# Altium PCB PCB_2021-02-27.pcbdoc (part 1 of 2)
Units mil, origin at the board's own origin, x right, y up, seen from the top; angles counter-clockwise.
Board outline 2908.11 x 4260.21 mil, 2 copper layers (Top Layer, Bottom Layer); 56 components, 104 nets, 335 pads, 150 vias.
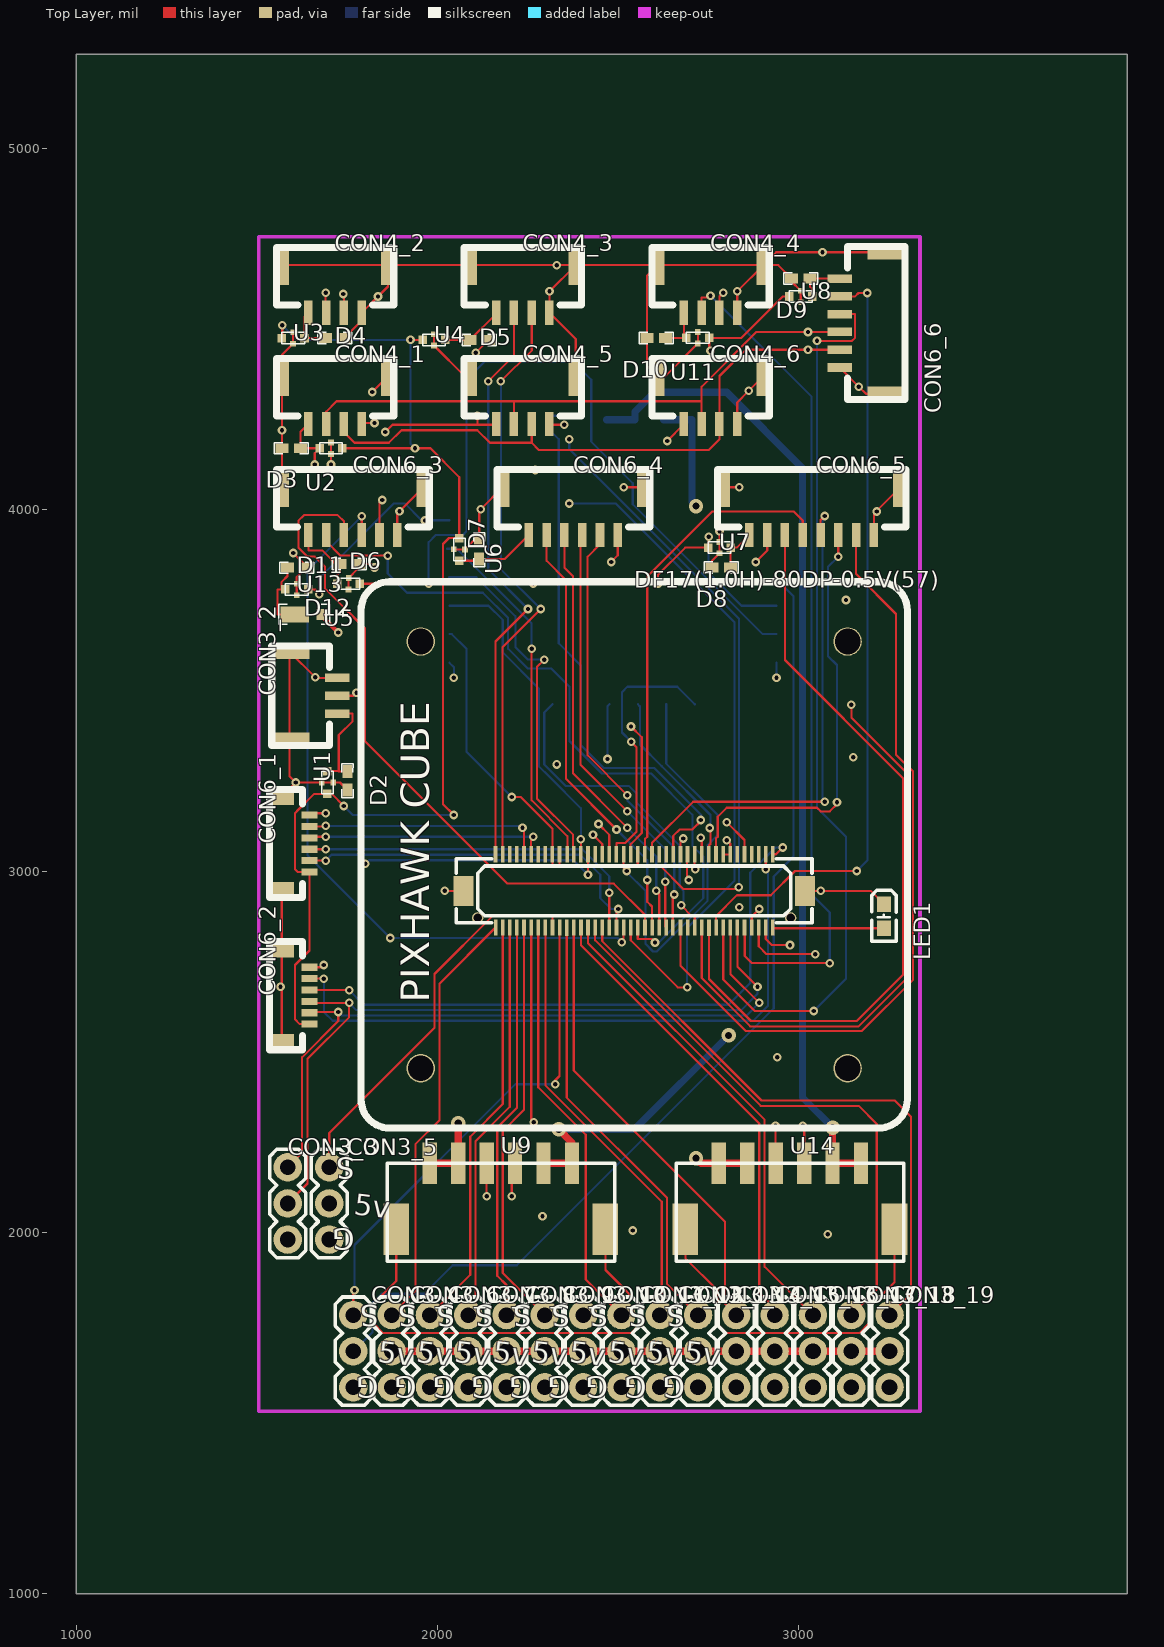
[diagram p0: Top Layer view]
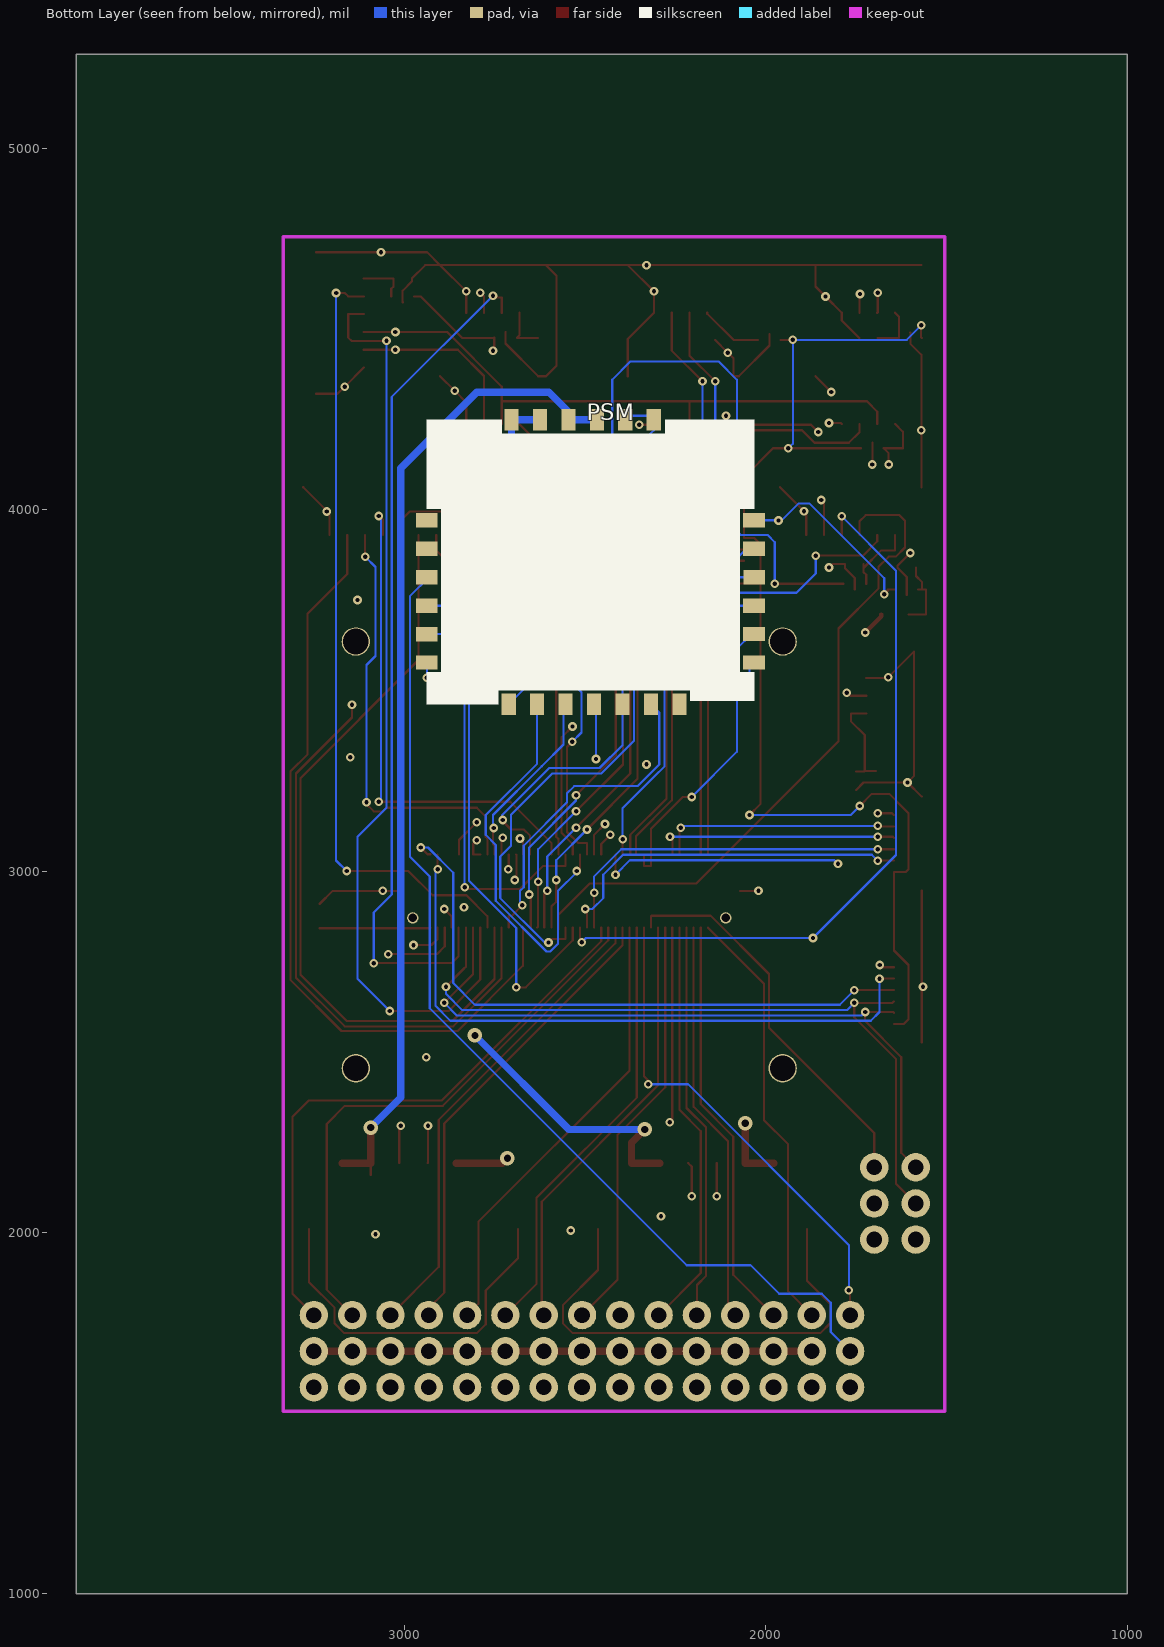
[diagram p1: Bottom Layer view, seen from below]

## Layer stack, top to bottom
Top Layer: signal copper (thickness not stored)
Dielectric: dielectric 12.6, FR-4, Dk 4.8
Bottom Layer: signal copper (thickness not stored)

## Board outline
3908.11,1000 1000,1000 1000,5260.21 3908.11,5260.21

## Components (designator, comment, footprint, x,y, rotation, side; value= is the part's Value field where it differs from the comment)
CON3_2 "ADC" BM03B-GHS-TBT 1722.01,3485 r90 top
CON3_3 "SERIAL 5" "3X1 THROUGH HOLE HEADER" 1585,2180 r0 top
CON3_4 "RC Rx" "3X1 SERVO HEADER" 1766.61,1771.03 r0 top
CON3_5 "SBUS OUT" "3X1 SERVO HEADER" 1700,2180 r0 top
CON3_6 "MOTOR 1" "3X1 SERVO HEADER" 1872.61,1771.03 r0 top
CON3_7 "MOTOR 2" "3X1 SERVO HEADER" 1978.61,1771.03 r0 top
CON3_8 "MOTOR 3" "3X1 SERVO HEADER" 2084.61,1771.03 r0 top
CON3_9 "MOTOR 4" "3X1 SERVO HEADER" 2190.61,1771.03 r0 top
CON3_10 "MOTOR 5" "3X1 SERVO HEADER" 2296.61,1771.03 r0 top
CON3_11 "MOTOR 6" "3X1 SERVO HEADER" 2402.61,1771.03 r0 top
CON3_12 "MOTOR 7" "3X1 SERVO HEADER" 2508.61,1771.03 r0 top
CON3_13 "MOTOR 8" "3X1 SERVO HEADER" 2614.61,1771.03 r0 top
CON3_14 "AUX1" "3X1 THROUGH HOLE HEADER" 2720.61,1771.03 r0 top
CON3_15 "AUX2" "3X1 THROUGH HOLE HEADER" 2826.61,1771.03 r0 top
CON3_16 "AUX3" "3X1 THROUGH HOLE HEADER" 2932.61,1771.03 r0 top
CON3_17 "AUX4" "3X1 THROUGH HOLE HEADER" 3038.61,1771.03 r0 top
CON3_18 "AUX5" "3X1 THROUGH HOLE HEADER" 3144.61,1771.03 r0 top
CON3_19 "AUX6" "3X1 THROUGH HOLE HEADER" 3250.61,1771.03 r0 top
CON4_1 "I2C" BM04B-GHS-TBT 1715.84,4237.5 r0 top
CON4_2 "CAN 1" BM04B-GHS-TBT 1715.84,4545 r0 top
CON4_3 "CAN 2" BM04B-GHS-TBT 2235.42,4545 r0 top
CON4_4 "CAN 3" BM04B-GHS-TBT 2755,4545 r0 top
CON4_5 "I2C" BM04B-GHS-TBT 2235.42,4237.5 r0 top
CON4_6 "I2C" BM04B-GHS-TBT 2755,4237.5 r0 top
CON6_1 "JTAG IO" SM06B-SURS-TF 1645.24,3075.9 r90 top
CON6_2 "JTAG FMU" SM06B-SURS-TF 1645.24,2655 r90 top
CON6_3 "TELEM 1" BM06B-GHS-TBT 1765,3930 r0 top
CON6_4 "TELEM 2" BM06B-GHS-TBT 2375.31,3930 r0 top
CON6_5 "GPS 1" BM08B-GHS-TBT 3034.84,3930 r0 top
CON6_6 "GPS 2" BM06B-GHS-TBT 3112.79,4516.66 r270 top
D2 "DIODE" "0402 DIODE" 1750,3250 r270 top
D3 "DIODE" "0402 DIODE" 1595,4170 r180 top
D4 "DIODE" "0402 DIODE" 1715.59,4475 r0 top
D5 "DIODE" "0402 DIODE" 2115,4470 r0 top
D6 "DIODE" "0402 DIODE" 1755,3850 r0 top
D7 "DIODE" "0402 DIODE" 2115,3889.42 r90 top
D8 "DIODE" "0402 DIODE" 2785,3840 r180 top
D9 "DIODE" "0402 DIODE" 3005,4640 r180 top
D10 "DIODE" "0402 DIODE" 2605,4475 r180 top
D11 "DIODE" "0402 DIODE" 1610,3839.41 r0 top
D12 "DIODE" "MSS1P4-M3/89A DIODE" 1630.51,3710.06 r0 top
DF17(1.0H)-80DP-0.5V(57) "PIXHAWK Cube" CON-DF17-80M 2543.9,2945 r0 top
LED1 "19-213/Y2C-CQ2R2L/3T(CY)" LED0603-R-RD 3235,2875 r270 top
PSM "Power Selection Module" "POWER SELECTION MODULE" 2495,3865 r0 bottom
U1 "FILTER" "0603 LC EMI FILTER" 1695,3245 r90 top
U2 "FILTER" "0603 LC EMI FILTER" 1705,4170 r180 top
U3 "FILTER" "0603 LC EMI FILTER" 1600,4475 r0 top
U4 "FILTER" "0603 LC EMI FILTER" 1990,4470 r0 top
U5 "FILTER" "0603 LC EMI FILTER" 1753.51,3795 r180 top
U6 "FILTER" "0603 LC EMI FILTER" 2060,3890 r270 top
U7 "FILTER" "0603 LC EMI FILTER" 2780,3895 r0 top
U8 "FILTER" "0603 LC EMI FILTER" 3005,4590 r0 top
U9 "Battery1" "MOLEX CLICKMATE 2.0-6P" 2175,2100 r0 top
U11 "FILTER" "0603 LC EMI FILTER" 2720.1,4475.74 r180 top
U13 "FILTER" "0603 LC EMI FILTER" 1610,3779.26 r0 top
U14 "Battery2" "MOLEX CLICKMATE 2.0-6P" 2975,2100 r0 top

## Footprints (in the part's own frame and the unit in brackets; to place one, negate y for a bottom-side part, rotate by r counter-clockwise, add the part's x,y. Pads: shape width x height; smd on the part's side, far side on the other; paste and mask are expansions set on the pad)
"3X1 SERVO HEADER" [mm]
  round 2 hole 1.1: 1(0,0) 2(0,-2.54) 3(0,-5.08)
  silkscreen extent -1.27,-6.35 1.27,1.27
"3X1 THROUGH HOLE HEADER" [mm]
  round 2 hole 1.1: 1(0,0) 2(0,-2.54) 3(0,-5.08)
  silkscreen extent -1.27,-6.35 1.27,1.27
"0402 DIODE" [mm]
  rect 0.9x0.7 smd: 1(-0.65,0) 2(0.65,0)
  silkscreen extent -1.2,-0.4 1.2,0.4
"0603 LC EMI FILTER" [mm]
  rect 0.6x0.6 smd: 1(-0.8,0) 2(0.8,0)
  rect 0.4x0.4 smd: GND(-0.003,-0.4) GND(0,0.4)
  silkscreen extent -0.8,-0.4 0.8,0.4
BM03B-GHS-TBT [mm]
  rect 0.6x1.7 smd: 1(-1.25,0) 2(0,0) 3(1.25,0)
  rect 1x2.8 smd: GND(-3.1,3.35) GND(3.1,3.35)
  silkscreen extent -3.5,0.55 3.5,4.6
BM04B-GHS-TBT [mm]
  rect 0.6x1.7 smd: 1(-1.87,0) 2(-0.62,0) 3(0.63,0) 4(1.88,0)
  rect 1x2.8 smd: GND(-3.721,3.35) GND(3.729,3.35)
  silkscreen extent -4.12,0.55 4.13,4.6
BM06B-GHS-TBT [mm]
  rect 0.6x1.7 smd: 1(-3.12,0) 2(-1.87,0) 3(-0.62,0) 4(0.63,0) 5(1.88,0) 6(3.13,0)
  rect 1x2.8 smd: GND(-4.97,3.35) GND(4.97,3.35)
  silkscreen extent -5.37,0.55 5.38,4.6
BM08B-GHS-TBT [mm]
  rect 0.6x1.7 smd: 1(-4.37,0) 2(-3.12,0) 3(-1.87,0) 4(-0.62,0) 5(0.63,0) 6(1.88,0) 7(3.13,0) 8(4.38,0)
  rect 1x2.8 smd: GND(-6.22,3.35) GND(6.23,3.35)
  silkscreen extent -6.62,0.55 6.63,4.6
CON-DF17-80M [mm]
  rect 0.254x1.15 smd: 1(9.75,2.57) 2(9.75,-2.57) 3(9.252,2.565) 4(9.251,-2.575) 5(8.754,2.567) 6(8.755,-2.578) 7(8.254,2.567) 8(8.259,-2.577) 9(7.752,2.566) 10(7.757,-2.578) 11(7.252,2.566) 12(7.257,-2.578) 13(6.751,2.566) 14(6.755,-2.578) 15(6.251,2.566) 16(6.256,-2.578) 17(5.751,2.566) 18(5.755,-2.578) 19(5.251,2.565) 20(5.256,-2.579) 21(4.751,2.566) 22(4.755,-2.578) 23(4.25,2.566) 24(4.254,-2.578) 25(3.751,2.566) 26(3.755,-2.578) 27(3.252,2.567) 28(3.258,-2.575) 29(2.751,2.566) 30(2.707,-2.577) 31(2.257,2.567) 32(2.256,-2.578) 33(1.752,2.566) 34(1.761,-2.577) 35(1.253,2.567) 36(1.257,-2.578) 37(0.752,2.566) 38(0.758,-2.577) 39(0.253,2.566) 40(0.257,-2.578) 41(-0.249,2.566) 42(-0.242,-2.578) 43(-0.747,2.566) 44(-0.744,-2.578) 45(-1.248,2.566) 46(-1.242,-2.578) 47(-1.749,2.566) 48(-1.743,-2.578) 49(-2.248,2.566) 50(-2.245,-2.578) 51(-2.748,2.566) 52(-2.743,-2.578) 53(-3.246,2.566) 54(-3.244,-2.578) 55(-3.749,2.566) 56(-3.742,-2.578) 57(-4.245,2.565) 58(-4.245,-2.578) 59(-4.697,2.566) 60(-4.741,-2.579) 61(-5.248,2.566) 62(-5.244,-2.578) 63(-5.748,2.566) 64(-5.743,-2.578) 65(-6.247,2.567) 66(-6.244,-2.578) 67(-6.746,2.568) 68(-6.742,-2.577) 69(-7.248,2.566) 70(-7.242,-2.576) 71(-7.749,2.566) 72(-7.743,-2.578) 73(-8.245,2.566) 74(-8.245,-2.578) 75(-8.748,2.566) 76(-8.741,-2.578) 77(-9.246,2.566) 78(-9.244,-2.578) 79(-9.748,2.566) 80(-9.742,-2.578)
  round 2 hole 1.8: 81(-15,-12.47) 82(15,17.53) 83(-15,17.53) xx(15,-12.47)
  round 0.8 hole 0.6: HOLE1(11.001,-1.9) HOLE2(-11.001,-1.9)
  rect 1.4x2.101 smd: SIT1(12.011,0) SIT2(-12,0)
  silkscreen extent -19.2,-16.67 19.2,21.73
LED0603-R-RD [mil]
  rect 43x39 smd: 1(33.5,0) 2(-33.5,0)
  silkscreen extent -72,-34 70,34
"MOLEX CLICKMATE 2.0-6P" [mm]
  rect 1x2.9 smd: 1(5,2.325) 2(3,2.325) 3(1,2.325) 4(-1,2.325) 5(-3,2.325) 6(-5,2.325)
  rect 1.8x3.6 smd: 7(-7.35,-2.325) 7(7.35,-2.325)
  silkscreen extent -8,-4.57 8,2.32
"MSS1P4-M3/89A DIODE" [mm]
  rect 2x1.1 smd: 1(-0.648,-0.002)
  rect 0.8x0.8 smd: 2(1.252,-0.002)
  silkscreen extent -1.8,-0.7 1.8,0.7
"POWER SELECTION MODULE" [mil]
  rect 60x39.37 smd: 1(442.91,-105.91) 2(442.91,-27.17) 3(443.11,51.97) 4(442.92,130.71) 5(442.91,209.45) 6(442.91,288.19) 14(-462.6,288.2) 15(-462.6,209.44) 16(-462.6,130.7) 17(-462.7,51.96) 18(-462.5,-26.77) 19(-462.6,-105.51)
  rect 39.37x60 smd: 7(216.52,403.54) 8(137.8,403.54) 9(59.06,403.54) 10(-19.67,403.44) 11(-98.42,403.54) 12(-177.16,403.64) 13(-255.9,403.44) 20(-185.05,-383.86) 21(-106.3,-383.86) 22(-27.56,-383.76) 23(51.18,-383.86) 24(129.92,-383.86) 25(208.66,-383.76)
  silkscreen extent -463,-384 443,404
SM06B-SURS-TF [mm]
  rect 0.5x1.1 smd: 1(-2,0) 2(-1.2,0) 3(-0.4,0) 4(0.4,0) 5(1.2,0) 6(2,0)
  rect 1.2x1.7 smd: GND(-3.3,1.95) GND(3.3,1.95)
  silkscreen extent -3.8,0.5 3.8,2.8

## Via types
v1: diameter 24, hole 12, Top Layer to Bottom Layer, 144 vias
v2: diameter 40, hole 20, Top Layer to Bottom Layer, 6 vias

## Nets (pads, with @x,y where several pads share a name; then routed paths per layer and width w, separated by ;. In a path a pad name is that pad's centre, name@x,y a point inside that pad or via, vN(x,y) a via of type N, cw(c..) or ccw(c..) an arc to the next point about the centre after c; other vN are vias at no path point)
ALARM: DF17(1.0H)-80DP-0.5V(57).24 PSM.12 | length 911.8
  Top Layer w6: v1(2674.1,2904.8) 2703.6,2875.2 2711.4,2875.2 2711.4,2843.5
  Bottom Layer w6: PSM.12@2317.9,3461.4 2295,3438.5 2295,3295 2355,3235 2530,3235 2550,3215 2550,3190 2670,3070 2670,2955 2680,2945 2680,2910.7 v1(2674.1,2904.8)
AUX_BATT_CURRENT_SENS: DF17(1.0H)-80DP-0.5V(57).25 U14.3 | length 989.5
  Top Layer w6: 2691.6,3046 2690,3044.4 2690,2980 v1(2695,2975) ; v1(3010,2295) 3014.37,2290.63 U14.3@3014.37,2191.53
  Mid-Layer 2 w6: v1(2695,2975) 2770,2900 2770,2535 v1(3010,2295)
AUX_BATT_VOLTAGE_SENS: DF17(1.0H)-80DP-0.5V(57).23 U14.4 | length 994.4
  Top Layer w6: 2711.23,3046.03 2711.23,3008.77 v1@2715,3005 ; v1(2935,2295) 2935,2192.17 U14.4@2935.63,2191.53
  Mid-Layer 2 w6: v1@2715,3005 2690,3005 2670,2985 2670,2965 2755,2880 2755,2530 2935,2350 v1@2935,2300
  other v1: 2713,3005
BATT_CURRENT_SENS_PROT: DF17(1.0H)-80DP-0.5V(57).49 U9.3 | length 1324.1
  Top Layer w6: v1(2205,2100) 2205,2182.17 U9.3@2214.37,2191.53 ; v1(2430,3100) 2455.41,3074.59 2455.41,3046.03
  Mid-Layer 2 w6: v1(2205,2100) 2205,2975 2345,3115 2415,3115 v1(2430,3100)
BATT_VOLTAGE_SENS_PROT: DF17(1.0H)-80DP-0.5V(57).47 U9.4 | length 1407.6
  Top Layer w6: v1(2135.63,2100) U9.4@2135.63,2191.53 ; v1(2445,3130) 2475.06,3099.94 2475.06,3046.03
  Mid-Layer 2 w6: v1(2135.63,2100) 2170,2134.37 2170,2890 2170,2960 2315,3105 2340,3130 v1(2445,3130)
BUZZER_OUT: PSM.13
CAN_H_1: CON4_3.2 DF17(1.0H)-80DP-0.5V(57).79 | length 1611.2
  Top Layer w6: v1(2140,4355) 2211.01,4426.01 CON4_3.2@2211.01,4545 ; 2160.14,3046.03 2160.14,3635.14 v1(2250,3725)
  Bottom Layer w6: v1(2140,4355) 2140,3835 v1(2250,3725)
CAN_H_2: CON4_2.2 DF17(1.0H)-80DP-0.5V(57).41 | length 2295.8
  Top Layer w6: v1(1690,4600) 1690,4546.43 CON4_2.2@1691.43,4545 ; 2534.1,3046 2534.1,3074.1 2565,3105 2565,3370 v1(2535,3400)
  Mid-Layer 2 w6: v1(1690,4600) 1695,4600 2125,4170 2460,4170 2560,4070 2560,3970 2670,3860 2670,3535 v1(2535,3400)
CAN_H_3: CON4_4.2 DF17(1.0H)-80DP-0.5V(57).10 | length 2374.4
  Top Layer w6: CON4_4.2@2730.59,4545 2730.6,4587.6 2750.7,4587.6 v1(2755.1,4592) ; 2850,2843.5 2850,2765 2870,2745 v1(3085,2745)
  Bottom Layer w6: v1(2755.1,4592) 3035,4312.1 3035,2935 3085,2885 v1(3085,2745)
CAN_L_1: CON4_3.3 DF17(1.0H)-80DP-0.5V(57).77 | length 1623.4
  Top Layer w6: v1(2175,4355) 2260.23,4440.23 CON4_3.3@2260.23,4545 ; 2179.87,3046.03 2179.87,3619.87 v1(2285,3725)
  Bottom Layer w6: v1(2175,4355) 2175,3835 v1(2285,3725)
CAN_L_2: CON4_2.3 DF17(1.0H)-80DP-0.5V(57).39 | length 2625.4
  Top Layer w6: v1(1739.1,4597.1) 1739.1,4589.2 1740.7,4587.6 CON4_2.3@1740.7,4545 ; 2553.9,3046 2553.9,3014.3 2615.7,3014.3 2680,2950 2828,2950 v1(2833.3,2955.3)
  Mid-Layer 2 w6: v1(1739.1,4597.1) 1739.1,4585.9 2129.7,4195.3 v1(2364.3,4195.3)
  Bottom Layer w6: v1(2364.3,4195.3) 2364.3,4168 2833.6,3698.7 2833.6,2955.5 v1(2833.3,2955.3)
CAN_L_3: CON4_4.3 DF17(1.0H)-80DP-0.5V(57).8 | length 1865.8
  Top Layer w6: CON4_4.3@2779.81,4545 2779.81,4589.81 v1(2790,4600) ; 2869.04,2843.56 2869.04,2874.04 v1(2890,2895)
  Mid-Layer 2 w6: v1(2790,4600) 2805,4585 2805,3320 2880,3245 2880,3240 2880,2905 v1(2890,2895)
CON3_2_1: CON3_2.1 D2.1 U1.2 | length 273.2
  Top Layer w6: U1.2@1695,3276.5 1726.2,3276.5 ; CON3_2.1@1722.02,3435.79 1764.6,3435.8 1764.6,3414.9 1726.2,3376.5 1726.2,3276.5 ; D2.1@1750,3275.59 1727.1,3275.6 1726.2,3276.5
D4_1: CON4_2.1 D4.1 U3.2 | length 132.9
  Top Layer w6: CON4_2.1@1642.22,4544.99 1631.5,4534.27 U3.2@1631.5,4475 D4.1@1690,4475
D5_1: CON4_3.1 D5.1 U4.2 | length 172.9
  Top Layer w6: U4.2@2021.5,4470 D5.1@2089.41,4470 2161.8,4542.39 CON4_3.1@2161.8,4544.99
D6_1: CON6_3.1 D6.1 U5.2 | length 208
  Top Layer w6: CON6_3.1@1642.17,3930 1642.2,3887.4 1680.5,3887.4 D6.1@1729.4,3838.6 ; U5.2@1722.01,3795 1722,3819.7 1729.4,3827.1 D6.1@1729.4,3838.6 ; D6.1@1729.41,3850 D6.1@1729.4,3838.6
D7_1: CON6_4.1 D7.1 U6.2 | length 222.1
  Top Layer w6: U6.2@2060,3858.5 2109.67,3858.5 D7.1@2115,3863.83 2186.31,3863.83 CON6_4.1@2252.48,3930
D8_1: CON6_5.1 D8.1 U7.2 | length 121.2
  Top Layer w6: D8.1@2810.59,3840 2810.59,3894.09 U7.2@2811.5,3895 2827.79,3895 CON6_5.1@2862.79,3930
D9_1: CON6_6.1 D9.1 U8.2 | length 134.9
  Top Layer w6: U8.2@3036.5,4590 3036.5,4611.2 3030.6,4617.1 D9.1@3030.59,4640 3069.7,4640 3070.2,4639.5 CON6_6.1@3112.79,4639.49
D10_1: CON4_4.1 D10.1 U11.2 | length 130.6
  Top Layer w6: D10.1@2630.59,4475 2687.86,4475 U11.2@2688.6,4475.74 2681.38,4482.96 CON4_4.1@2681.38,4544.99
D11_1: D11.1 D12.1 U13.1 | length 216.4
  Top Layer w6: D11.1@1584.41,3839.41 1584.4,3816.5 1568.1,3800.2 1568.1,3779.3 U13.1@1578.51,3779.26 1557.6,3779.3 1556.5,3778.2 1556.5,3710 D12.1@1605,3710
DF17(1.0H)-80DP-0.5V(57)_26: DF17(1.0H)-80DP-0.5V(57).26
DF17(1.0H)-80DP-0.5V(57)_65: DF17(1.0H)-80DP-0.5V(57).65
EXTERN_CS: DF17(1.0H)-80DP-0.5V(57).5
EXTERN_DRDY: DF17(1.0H)-80DP-0.5V(57).11
FMU-!RESET: DF17(1.0H)-80DP-0.5V(57).7
FMU-CH1-PROT: CON3_19.1 DF17(1.0H)-80DP-0.5V(57).50 | length 1667
  Top Layer w6: 2455.5,2843.5 2455.5,2805.9 2896.4,2365 3265,2365 3310,2320 3310,1830.4 CON3_19.1@3250.61,1771.03
FMU-CH2-PROT: CON3_18.1 DF17(1.0H)-80DP-0.5V(57).52 | length 1583
  Top Layer w6: 2435.9,2843.5 2435.9,2808.3 2894.2,2350 3165,2350 3215,2300 3215,1841.4 CON3_18.1@3144.61,1771.03
FMU-CH3-PROT: CON3_17.1 DF17(1.0H)-80DP-0.5V(57).54 | length 1330.3
  Top Layer w6: 2416.2,2843.5 2416.2,2800.1 2905,2311.3 2905,1904.6 CON3_17.1@3038.61,1771.03
FMU-CH4-PROT: CON3_16.1 DF17(1.0H)-80DP-0.5V(57).56 | length 1294.5
  Top Layer w6: 2396.6,2843.5 2396.6,2794.4 2890,2301 2890,1833.2 2932.6,1790.6 CON3_16.1@2932.61,1771.03
FMU-CH5-PROT: CON3_15.1 DF17(1.0H)-80DP-0.5V(57).58 | length 1258.8
  Top Layer w6: 2376.79,2843.51 2376.79,2448.09 2795.46,2029.41 2795.46,1802.18 CON3_15.1@2826.61,1771.03
FMU-CH6-PROT: CON3_14.1 DF17(1.0H)-80DP-0.5V(57).60 | length 1223
  Top Layer w6: 2357.2,2843.5 2357.2,2372.8 2635,2095 2635,1856.6 CON3_14.1@2720.61,1771.03
FMU-LED_AMBER: DF17(1.0H)-80DP-0.5V(57).2 LED1.1 | length 308.2
  Top Layer w6: 2927.76,2843.82 2930.08,2841.5 LED1.1@3235,2841.5
FMU-SWCLK: CON6_2.5 DF17(1.0H)-80DP-0.5V(57).3 | length 1809.8
  Top Layer w6: CON6_2.5@1645.24,2702.25 1676,2702.2 v1(1685.2,2702.2) ; v1(2908.2,3005) 2908.2,3046
  Bottom Layer w6: v1(1685.2,2702.2) 1685.2,2609.8 1709.4,2585.6 2873,2585.6 2913.8,2626.4 2913.8,2999.4 v1(2908.2,3005)
FMU-SWDIO: CON6_2.4 DF17(1.0H)-80DP-0.5V(57).1 | length 1720.5
  Top Layer w6: CON6_2.4@1645.24,2670.75 1754.25,2670.75 v1(1755,2670) ; 2927.76,3046.18 2936.18,3046.18 v1(2955,3065)
  Bottom Layer w6: v1(1755,2670) 1795,2630 2805,2630 2865,2690 2865,2995 2935,3065 v1(2955,3065)
GND: CON3_2.3 CON3_2.GND CON3_3.3 CON3_4.3 CON3_5.3 CON3_6.3 CON3_7.3 CON3_8.3 CON3_9.3 CON3_10.3 CON3_11.3 CON3_12.3 CON3_13.3 CON3_14.3 CON3_15.3 CON3_16.3 CON3_17.3 CON3_18.3 CON3_19.3 CON4_1.4 CON4_1.GND CON4_2.4 CON4_2.GND CON4_3.4 CON4_3.GND CON4_4.4 CON4_4.GND CON4_5.4 CON4_5.GND CON4_6.4 CON4_6.GND CON6_1.6 CON6_1.GND CON6_2.6 CON6_2.GND CON6_3.6 CON6_3.GND CON6_4.6 CON6_4.GND CON6_5.8 CON6_5.GND CON6_6.6 CON6_6.GND D2.2 D3.2 D4.2 D5.2 D6.2 D7.2 D8.2 D9.2 D10.2 D11.2 DF17(1.0H)-80DP-0.5V(57).13 DF17(1.0H)-80DP-0.5V(57).15 DF17(1.0H)-80DP-0.5V(57).HOLE1 DF17(1.0H)-80DP-0.5V(57).HOLE2 DF17(1.0H)-80DP-0.5V(57).SIT1 DF17(1.0H)-80DP-0.5V(57).SIT2 LED1.2 PSM.6 PSM.14 U1.GND U2.GND U3.GND U4.GND U5.GND U6.GND U7.GND U8.GND U9.5 U9.6 U11.GND U13.GND U14.5 U14.6 | length 7578.9
  Top Layer w6: CON6_2.GND@1568.47,2525.08 1568.46,2676.54 v1(1565,2680) 1568.5,2683.5 CON6_2.GND@1568.48,2784.92 CON6_1.GND@1568.47,2945.98 ; CON6_1.GND@1568.48,3205.82 v1(1607.66,3245) ; CON6_3.GND@1569.34,4061.89 v1(1569.34,4220) CON4_1.GND@1569.34,4369.39 1569.33,4428.68 1599.9,4459.25 1599.9,4490.65 U3.GND@1600,4490.75 ; CON4_2.GND@1569.34,4676.89 CON4_2.GND@1862.64,4676.89 ; v1(1600,3880) 1635.59,3844.41 D11.2@1635.59,3839.41 1610,3813.82 U13.GND@1610,3795 1609.9,3794.9 U13.GND@1609.9,3763.52 ; CON6_2.6@1645.24,2733.74 1678.74,2733.74 v1(1685,2740) ; CON6_1.6@1645.24,3154.64 1650.6,3160 v1(1690,3160) ; v1(1705,4125) U2.GND@1705,4154.26 1705,4185.64 U2.GND@1705.1,4185.74 ; CON3_2.3@1722.01,3534.21 1662.95,3534.21 v1(1661.08,3536.08) CON3_2.GND@1590.12,3607.05 CON3_2.GND@1590.12,3362.96 1590.12,3262.54 v1(1607.66,3245) ; D4.2@1741.18,4475 1789.86,4523.68 CON4_2.4@1789.86,4545 v1(1834.93,4590.07) 1862.64,4617.78 CON4_2.GND@1862.64,4676.89 ; D2.2@1750,3224.41 1729.51,3244.9 1710.75,3244.9 1710.65,3245 1679.25,3245 v1(1607.66,3245) ; U5.GND@1753.51,3779.26 1753.61,3779.36 U5.GND@1753.61,3810.74 1780.59,3837.72 D6.2@1780.59,3850 1815,3850 v1(1825,3840) ; CON4_1.4@1789.86,4237.5 1792.36,4240 v1(1825,4240) ; v1(1819.13,4325.88) CON4_1.GND@1862.64,4369.39 ; CON6_3.6@1888.23,3930 1888.23,3989.45 v1(1894.39,3995.61) CON6_3.GND@1960.67,4061.89 ; U4.GND@1990,4485.74 1989.9,4485.64 U4.GND@1989.9,4454.26 2074.77,4369.39 CON4_5.GND@2088.92,4369.39 2088.92,4418.33 v1(2105.3,4434.7) D5.2@2140.59,4470 ; v1(2020,2945) 2071.46,2945 ; U6.GND@2044.25,3890.1 2044.35,3890 2075.75,3890 2100.75,3915 D7.2@2115,3915.01 2115,3997.24 v1(2118.88,4001.12) CON6_4.GND@2179.65,4061.89 ; CON4_5.4@2309.44,4237.5 2311.94,4235 v1(2350,4235) ; CON4_5.GND@2382.22,4369.39 2382.22,4472.22 CON4_3.4@2309.44,4545 v1(2309.44,4604.11) CON4_3.GND@2382.22,4676.89 ; v1(2480,3855) 2498.54,3873.54 CON6_4.6@2498.54,3930 ; v1(2515,4061.89) CON6_4.GND@2570.98,4061.89 ; U11.GND@2720.2,4491.48 2720.1,4491.39 U11.GND@2720.1,4460 2629.5,4369.39 CON4_6.GND@2608.5,4369.39 2579.42,4398.47 D10.2@2579.41,4475 2579.42,4647.81 CON4_4.GND@2608.5,4676.89 ; D8.2@2759.41,3840 2759.42,3858.78 U7.GND@2779.9,3879.26 2779.9,3910.64 U7.GND@2780,3910.74 v1(2780,3940) ; CON6_5.GND@2789.96,4061.89 v1@2840,4061.89 ; 2790.02,3046.03 2809.7,3046.03 2809.7,3075.3 v1(2800,3085) ; CON4_6.4@2829.02,4237.5 2829.02,4296.61 v1(2861.21,4328.79) CON4_6.GND@2901.8,4369.39 ; CON4_4.4@2829.02,4545 v1(2829.02,4604.11) CON4_4.GND@2901.8,4676.89 ; U8.GND@3004.9,4574.26 3005,4574.36 U8.GND@3005,4605.74 2979.42,4631.32 D9.2@2979.41,4640 2942.53,4676.89 CON4_4.GND@2901.8,4676.89 ; 3016.78,2945.01 v1(3060,2945.01) 3198.49,2945.01 LED1.2@3235,2908.5 ; CON6_6.6@3112.79,4393.43 v1(3165.61,4340.61) 3185.24,4320.99 CON6_6.GND@3244.68,4320.99 ; CON6_5.8@3207.28,3930 3207.28,3987.28 v1(3215,3995) 3215,3996.78 CON6_5.GND@3280.12,4061.89 ; CON6_6.GND@3244.68,4712.32 v1(3065,4712.32) 2937.23,4712.32 CON4_4.GND@2901.8,4676.89 ; CON4_2.GND@1862.64,4676.89 CON4_3.GND@2088.92,4676.89 v1(2330,4676.89) CON4_3.GND@2382.22,4676.89 ; CON4_3.GND@2382.22,4676.89 CON4_4.GND@2608.5,4676.89 ; CON4_4.GND@2608.5,4676.89 CON4_4.GND@2901.8,4676.89
  Top Layer w20: U9.6@1978.15,2191.53 U9.5@2056.89,2191.53 v2(2056.89,2301.89) ; v2(2715,2205) 2728.46,2191.54 U14.6@2778.15,2191.53 U14.5@2856.89,2191.53
  Bottom Layer w6: PSM.14@2032.4,3576.8 2045,3564.2 v1(2045,3535) ; v1(2937.91,3535) PSM.6@2937.91,3576.81
  other v1: 3080,1995 2540,2005 2290,2045 2940,2485 2835,2900 2330,3295 3150,3315 3130,3750 2835,4061.89 2270,4110
I2C_1_SCL: CON6_5.4 DF17(1.0H)-80DP-0.5V(57).37 | length 1327
  Top Layer w6: 2573.52,3046.03 2573.52,3088.52 2580,3095 2580,3815 2715,3950 2760,3995 2985.4,3995 3010.4,3970 CON6_5.4@3010.43,3930
I2C_1_SDA: CON6_5.5 DF17(1.0H)-80DP-0.5V(57).35 | length 1406.1
  Top Layer w6: 2593.3,3046.1 2593.3,3077.8 2707.4,3191.9 v1(3071.3,3191.9) ; CON6_5.5@3059.64,3930 3059.6,3972.6 3061.3,3972.6 v1(3071.3,3982.6)
  Bottom Layer w6: v1@3065,3190 v1@3065,3980.7
I2C_2_SCL: CON4_1.2 CON4_5.2 CON4_6.2 CON6_6.4 DF17(1.0H)-80DP-0.5V(57).6 | length 3936.2
  Top Layer w6: CON4_1.2@1691.43,4237.5 1691.4,4271.4 1720,4300 2211,4300 CON4_5.2@2211.01,4237.5 ; 2210.4,4300 2730,4300 ; CON4_6.2@2730.59,4237.5 2730.59,4340.59 2881.86,4491.86 v1(3025,4491.86) CON6_6.4@3112.79,4491.86 ; 2888.6,2843.5 2888.6,2791.4 2910,2770 v1(3045,2770)
  Mid-Layer 2 w6: v1(3025,4491.86) 3213.14,4491.86 3260,4445 3260,2980 v1@3045,2765
I2C_2_SDA: CON4_1.3 CON4_5.3 CON4_6.3 CON6_6.5 DF17(1.0H)-80DP-0.5V(57).4 | length 3833.6
  Top Layer w6: CON4_1.3@1740.65,4237.5 1740.6,4214.4 1770,4185 1865,4185 1900,4220 2110,4220 2145,4185 2260.2,4185 ; CON4_5.3@2260.23,4237.5 2260.2,4184.8 2280,4165 2750,4165 2779.8,4194.8 CON4_6.3@2779.81,4237.5 2779.81,4369.81 2852.64,4442.64 v1(3025,4442.64) CON6_6.5@3112.79,4442.64 ; 2908.11,2843.64 2908.11,2811.89 2925,2795 v1(2975,2795)
  Mid-Layer 2 w6: v1(2975,2795) 3055,2795 3245,2985 3245,4420 3222.4,4442.6 v1(3025,4442.64)
I2C_5V_BUS: CON4_1.1 CON4_5.1 CON4_6.1 D3.1 U2.2 | length 1388.5
  Top Layer w6: CON4_1.1@1642.22,4237.49 1620.59,4215.86 D3.1@1620.59,4170 U2.2@1673.5,4170 1660,4156.5 v1(1660,4125) ; v1(1855,4215) 1875,4235 2110,4235 ; v1(2110,4260) 2110,4235 ; CON4_5.1@2161.8,4237.49 2159.31,4235 2110,4235 ; v1(2635,4190) 2681.38,4236.38 CON4_6.1@2681.38,4237.49
  Mid-Layer 2 w6: v1(1660,4125) 1750,4215 v1(1855,4215) ; v1@2110,4265 2125,4280 2545,4280 v1(2635,4190)
IO-!RESET: DF17(1.0H)-80DP-0.5V(57).75
IO-CH1-PROT: CON3_6.1 DF17(1.0H)-80DP-0.5V(57).80 | length 1191.7
  Top Layer w6: CON3_6.1@1872.61,1771.03 1938.26,1836.67 1938.26,2243.89 2004.88,2310.52 2004.88,2688.05 2160.34,2843.51
IO-CH2-PROT: CON3_7.1 DF17(1.0H)-80DP-0.5V(57).78 | length 1155.9
  Top Layer w6: CON3_7.1@1978.61,1771.03 2090,1882.4 2090,2265 2180,2355 2180,2843.5
IO-CH3-PROT: CON3_8.1 DF17(1.0H)-80DP-0.5V(57).76 | length 1120.2
  Top Layer w6: CON3_8.1@2084.61,1771.03 2105,1791.4 2105,2252.6 2199.7,2347.3 2199.7,2843.5
IO-CH4-PROT: CON3_9.1 DF17(1.0H)-80DP-0.5V(57).74 | length 1105.6
  Top Layer w6: CON3_9.1@2190.61,1771.03 2190.6,1854.4 2165,1880 2165,2290 2219.3,2344.3 2219.3,2843.5
IO-CH5-PROT: CON3_10.1 DF17(1.0H)-80DP-0.5V(57).72 | length 1145.2
  Top Layer w6: 2239,2843.5 2239,2339 2180,2280 2180,1887.6 CON3_10.1@2296.61,1771.03
IO-CH6-PROT: CON3_11.1 DF17(1.0H)-80DP-0.5V(57).70 | length 1132.1
  Top Layer w6: 2258.8,2843.6 2258.8,2311.9 v1(2265.7,2305)
  Mid-Layer 2 w6: v1(2265.7,2305) 2402.6,2168 CON3_11.1@2402.61,1771.03
IO-CH7-PROT: CON3_12.1 DF17(1.0H)-80DP-0.5V(57).68 | length 1167.9
  Top Layer w6: 2278.4,2843.5 2278.4,2401.6 2410,2270 2410,1869.6 CON3_12.1@2508.61,1771.03
IO-CH8-PROT: CON3_13.1 DF17(1.0H)-80DP-0.5V(57).66 | length 1208.1
  Top Layer w6: 2298.1,2843.5 2298.1,2406.9 2620,2085 2620,1776.4 CON3_13.1@2614.61,1771.03
IO-LED_SAFET_PROT: CON6_5.7 DF17(1.0H)-80DP-0.5V(57).28 | length 2179.6
  Top Layer w6: 2672.2,2843.6 2672.2,2737.8 2852.9,2557.1 3174,2557.1 3315.8,2698.9 3315.8,3275.6 3268.6,3322 3268.6,3711.4 3158.1,3821.9 CON6_5.7@3158.07,3930
IO-SWCLK: CON6_1.5 DF17(1.0H)-80DP-0.5V(57).71 | length 668.2
  Top Layer w6: CON6_1.5@1645.24,3123.15 1688.15,3123.15 v1(1690,3125) ; v1(2235,3120) 2238.83,3116.17 2238.83,3046.03
  Bottom Layer w6: v1(1690,3125) 2230,3125 v1(2235,3120)
IO-SWDIO: CON6_1.4 DF17(1.0H)-80DP-0.5V(57).69 | length 672.8
  Top Layer w6: CON6_1.4@1645.24,3091.65 1648.59,3095 v1(1690,3095) ; 2258.6,3046 2258.6,3083.6 2265,3090 v1(2265,3095)
  Bottom Layer w6: v1(1690,3095) v1(2265,3095)
IO-USART1_RX_SPEKTRUM_DSM: CON6_1.3 DF17(1.0H)-80DP-0.5V(57).48 | length 1002.6
  Top Layer w6: CON6_1.3@1645.24,3060.16 v1(1690,3060.16) ; v1(2475,2940) 2475,2843.77 2475.26,2843.51
  Bottom Layer w6: v1(1690,3060.16) 2400.1,3060.16 2475,2985.26 v1(2475,2940)
IO-USART1_TX: CON6_1.2 DF17(1.0H)-80DP-0.5V(57).46 | length 1015.3
  Top Layer w6: CON6_1.2@1645.24,3028.66 v1(1690,3028.66) ; 2495,2843.5 2495,2890 v1(2500,2895)
  Bottom Layer w6: v1(1690,3028.66) 1706.3,3045 2395,3045 2450,2990 2450,2925 2480,2895 v1(2500,2895)
OTG_DM1: DF17(1.0H)-80DP-0.5V(57).33
OTG_DP1: DF17(1.0H)-80DP-0.5V(57).31
PPM-SBUS-PROT: CON3_4.1 DF17(1.0H)-80DP-0.5V(57).62 | length 1373.4
  Top Layer w6: CON3_4.1@1766.61,1771.03 1766.61,1836.61 v1(1770,1840) ; v1(2325,2410) 2325,2420 2337.46,2432.46 2337.46,2843.51
  Bottom Layer w6: v1(1770,1840) 1770,1965 2215,2410 v1(2325,2410)
PRESSURE_SENS_IN: CON3_2.2 DF17(1.0H)-80DP-0.5V(57).21 | length 1235.5
  Top Layer w6: CON3_2.2@1722.01,3485 1767.2,3485 v1(1775.6,3493.5) ; v1@2730,3095 2730.96,3094.04 2730.96,3046.03
  Mid-Layer 2 w6: v1(1775.6,3493.5) 1787.1,3505 2320,3505 v1@2730,3095
  other v1: 2728,3092
PSM_2: PSM.2
RX_5V0_OUT: CON3_4.2 PSM.3 | length 2841.4
  Bottom Layer w6: CON3_4.2@1766.61,1671.03 1820,1724.4 1820,1805 1845,1830 1962.9,1830 2041.9,1909 2219,1909 2930,2620 2930,2985 2985,3040 2985,3760.2 PSM.3@2932.2,3813
S$387: 
S$389: 
S$392: 
S$394: 
S$22554: 
S$22559: 
S.BUS_OUT: CON3_5.1 DF17(1.0H)-80DP-0.5V(57).64 | length 1081.2
  Top Layer w6: CON3_5.1@1700,2180 1700,2275 1991.2,2566.2 1991.2,2714.9 2152.6,2876.4 2316.6,2876.4 2317.8,2875.2 2317.8,2843.5
SAFETY: CON6_5.6 DF17(1.0H)-80DP-0.5V(57).17 | length 1226.2
  Top Layer w6: 2770,3046 2770,3090 2775,3095 2775,3150 2800,3175 3050,3175 3060,3165 3085,3165 3105,3185 v1(3105,3190) ; v1(3108.86,3870) CON6_5.6@3108.86,3930
  Bottom Layer w6: v1(3105,3190) 3105,3570 3080,3595 3080,3841.14 v1(3108.86,3870)
SERIAL1_CTS: CON6_3.4 DF17(1.0H)-80DP-0.5V(57).44 | length 2064.3
  Top Layer w6: CON6_3.4@1789.8,3930 v1(1789.8,3981.6) ; v1(2509.5,2802.7) 2509.5,2806.7 2514.6,2811.8 2514.6,2843.5
  Bottom Layer w6: v1(1789.8,3981.6) 1639.4,3831.2 1639.4,3044.2 v1(1869.2,2814.4) 2497.8,2814.4 v1(2509.5,2802.7)
SERIAL1_RTS: CON6_3.5 DF17(1.0H)-80DP-0.5V(57).42 | length 2525.1
  Top Layer w6: CON6_3.5@1839.02,3930 1839,4019 v1(1846.9,4026.9) ; 2534.4,2843.5 2534.4,2808 2664.4,2678 v1(2690.4,2678)
  Mid-Layer 2 w6: v1(1846.9,4026.9) 2354.3,4026.9 v1(2364,4017.3)
  Bottom Layer w6: v1(2364,4017.3) 2492.7,4017.3 2821.5,3688.5 2821.5,2973.2 2690.4,2842.2 v1(2690.4,2678)
SERIAL1_RX: CON6_3.3 DF17(1.0H)-80DP-0.5V(57).38 | length 1889.7
  Top Layer w6: CON6_3.3@1740.59,3930 1740.6,3967.6 1723.2,3985 1630,3985 1614.6,3969.6 1614.6,3895.4 1640,3870 1660,3870 1688.5,3841.5 1688.5,3781.5 1798.8,3671.2 1798.8,3359.5 2193.3,2965 2487.7,2965 2573.7,2879 2573.7,2838.5
SERIAL1_TX: CON6_3.2 DF17(1.0H)-80DP-0.5V(57).40 | length 2022
  Top Layer w6: CON6_3.2@1691.38,3930 1691.4,3912.6 1731.1,3872.9 v1(1861.8,3872.9) ; 2554,2843.5 2554,2811.8 2591.6,2811.8 v1(2601.3,2802.1)
  Bottom Layer w6: v1(1861.8,3872.9) 1861.8,3823.2 1915,3770 2125,3770 2195,3700 2195,3615 2250,3560 2315,3560 2365,3510 2365,3360 2455,3270 2590.7,3270 2705,3155.7 2705,3070 2735,3040 2735,2925 2612.1,2802.1 v1(2601.3,2802.1)
SERIAL2_CTS: CON6_4.4 DF17(1.0H)-80DP-0.5V(57).32 | length 1187.1
  Top Layer w6: CON6_4.4@2400.11,3930 2395,3924.9 2395,3295 v1(2525,3165) ; v1(2630,2970) 2630,2846.21 2632.7,2843.51
  Bottom Layer w6: v1(2525,3165) 2630,3060 v1(2630,2970)
SERIAL2_RTS: CON6_4.5 DF17(1.0H)-80DP-0.5V(57).30 | length 1202
  Top Layer w6: CON6_4.5@2449.33,3930 2449.3,3904.3 2415,3870 2415,3320 v1(2525,3210) ; 2650.5,2843.5 2650.5,2930.5 v1(2655,2935)
  Bottom Layer w6: v1(2525,3210) 2525,3195 2655,3065 v1(2655,2935)
SERIAL2_RX: CON6_4.3 DF17(1.0H)-80DP-0.5V(57).34 | length 1195.1
  Top Layer w6: CON6_4.3@2350.9,3930 2350.9,3839.1 2375,3815 2375,3270 v1(2525,3120) ; v1(2605,2945) 2613.22,2936.78 2613.22,2843.55
  Bottom Layer w6: v1(2525,3120) 2605,3040 v1(2605,2945)
SERIAL2_TX: CON6_4.2 DF17(1.0H)-80DP-0.5V(57).36 | length 1207.3
  Top Layer w6: CON6_4.2@2301.69,3930 2301.69,3858.31 2355,3805 2355,3255 v1(2495,3115) ; v1(2580,2975) 2580,2915 2593.37,2901.63 2593.37,2843.51
  Bottom Layer w6: v1(2495,3115) 2580,3030 v1(2580,2975)
SERIAL3_RX: CON6_5.3 DF17(1.0H)-80DP-0.5V(57).20 | length 2132.9
  Top Layer w6: 2750.8,2843.5 2750.8,2701.3 2867.1,2585 3160,2585 3287.9,2712.9 3287.9,3257.1 2961.22,3583.78 CON6_5.3@2961.22,3930
SERIAL3_TX: CON6_5.2 DF17(1.0H)-80DP-0.5V(57).22 | length 2237.1
  Top Layer w6: 2731.1,2843.5 2731.1,2703.9 2865,2570 3165,2570 3300,2705 3300,3270 3145,3425 v1@3145,3465 ; v1(2880,3855) 2912.01,3887.01 CON6_5.2@2912.01,3930
  Mid-Layer 2 w6: v1(2880,3855) 2880,3725 v1(3145,3460)
SERIAL4_RX: CON6_6.3 DF17(1.0H)-80DP-0.5V(57).16 | length 2572.2
  Top Layer w6: 2790.2,2843.5 2790.2,2699.7 2877.4,2612.5 v1(3040.7,2612.5) ; v1(3049.8,4467.2) 3146.5,4467.2 3155.4,4476.1 3155.4,4541.1 CON6_6.3@3112.79,4541.07
  Bottom Layer w6: v1(3040.7,2612.5) 3130,2701.8 3130,3095 3049.8,3175.2 v1(3049.8,4467.2)
SERIAL4_TX: CON6_6.2 DF17(1.0H)-80DP-0.5V(57).18 | length 2165.1
  Top Layer w6: 2770.5,2843.5 2770.5,2875.2 2828.2,2932.9 2922.1,2932.9 2989.2,3000 v1(3160,3000) ; CON6_6.2@3112.79,4590.28 3155.4,4590.3 3164.9,4599.8 v1(3189.2,4599.8)
  Bottom Layer w6: v1(3160,3000) 3189.2,3029.2 v1(3189.2,4599.8)
SERIAL5_RX: CON3_3.2 CON6_2.3 DF17(1.0H)-80DP-0.5V(57).12 | length 2100.3
  Top Layer w6: CON3_3.2@1585,2080 1640,2135 1640,2480 1755,2595 v1(1755,2635) 1649.5,2635 CON6_2.3@1645.24,2639.26 ; 2829.59,2843.51 2829.59,2740 2830,2739.59 2830,2735 2835,2730 v1(2885,2680)
  Bottom Layer w6: v1(1755,2635) 1775,2615 2840,2615 2885,2660 v1(2885,2680)
SERIAL5_TX: CON3_3.1 CON6_2.2 DF17(1.0H)-80DP-0.5V(57).14 | length 1994
  Top Layer w6: CON3_3.1@1585,2180 1625,2220 1625,2485 1725,2585 v1(1725,2610) 1647.48,2610 CON6_2.2@1645.24,2607.76 ; 2809.86,2843.51 2810,2843.37 2810,2715 v1(2890,2635)
  Bottom Layer w6: v1(1725,2610) 1735,2600 2855,2600 v1(2890,2635)
SPI_EXT_MISO: DF17(1.0H)-80DP-0.5V(57).67
SPI_EXT_MOSI: DF17(1.0H)-80DP-0.5V(57).51
SPI_EXT_SCK: DF17(1.0H)-80DP-0.5V(57).73
U9_7: U9.7 | length 1350.2
  Top Layer w6: U9.7@1885.63,2008.46 1885.6,1928.5 1885.6,1865.6 1821.1,1801.1 1821.1,1748.9 1849,1721 2534.4,1721 2561.6,1748.2 2561.6,1798.4 2464.4,1895.6 2464.4,1928.5 U9.7@2464.37,2008.46
U14_7: U14.7 | length 1029.7
  Top Layer w6: U14.7@2685.63,2008.46 2685.6,1928.5 2775.1,1839 2775.1,1745.8 2799.9,1721 3166.9,1721 3193.3,1747.5 3193.3,1790.9 3264.4,1861.9 U14.7@3264.37,2008.46
VBUS: DF17(1.0H)-80DP-0.5V(57).29 PSM.11 PSM.20 PSM.21 | length 1590.1
  Top Layer w6: 2652.2,3046 2652.2,3077.8 2652.2,3097.2 2670,3115 2705,3115 v1@2730,3140
  Bottom Layer w6: PSM.20@2309.95,4248.86 2310,4220 2335,4195 2335,3630 2396.59,3568.41 PSM.11@2396.58,3461.46 ; PSM.20@2311.3,4260 PSM.21@2390,4260 ; PSM.11@2396.58,3461.46 2396.6,3348.4 2460,3285 2599.6,3285 2609.6,3275 2730,3154.6 v1@2730,3140
  other v1: 2728,3141
VBUS_VALID: DF17(1.0H)-80DP-0.5V(57).59 PSM.18 | length 999.1
  Top Layer w6: v1(2260,3615) 2260,3195.6 2359,3096.6 2359,3046
  Bottom Layer w6: PSM.18@2026.6,3891.8 2053.2,3891.8 2260,3685 v1(2260,3615)
VDD_3V3_SPEKTRUM: PSM.1